# Altium PCB PCB_Mach_giao_tiep.PcbDoc (part 2 of 2)
Units mm, origin at the board's own origin, x right, y up, seen from the top; angles counter-clockwise.
Board outline 102.41 x 90.02 mm, 2 copper layers (Top Layer, Bottom Layer); 27 components, 181 nets, 442 pads, 75 vias.
Unrouted connection lines stored in the file: 4.
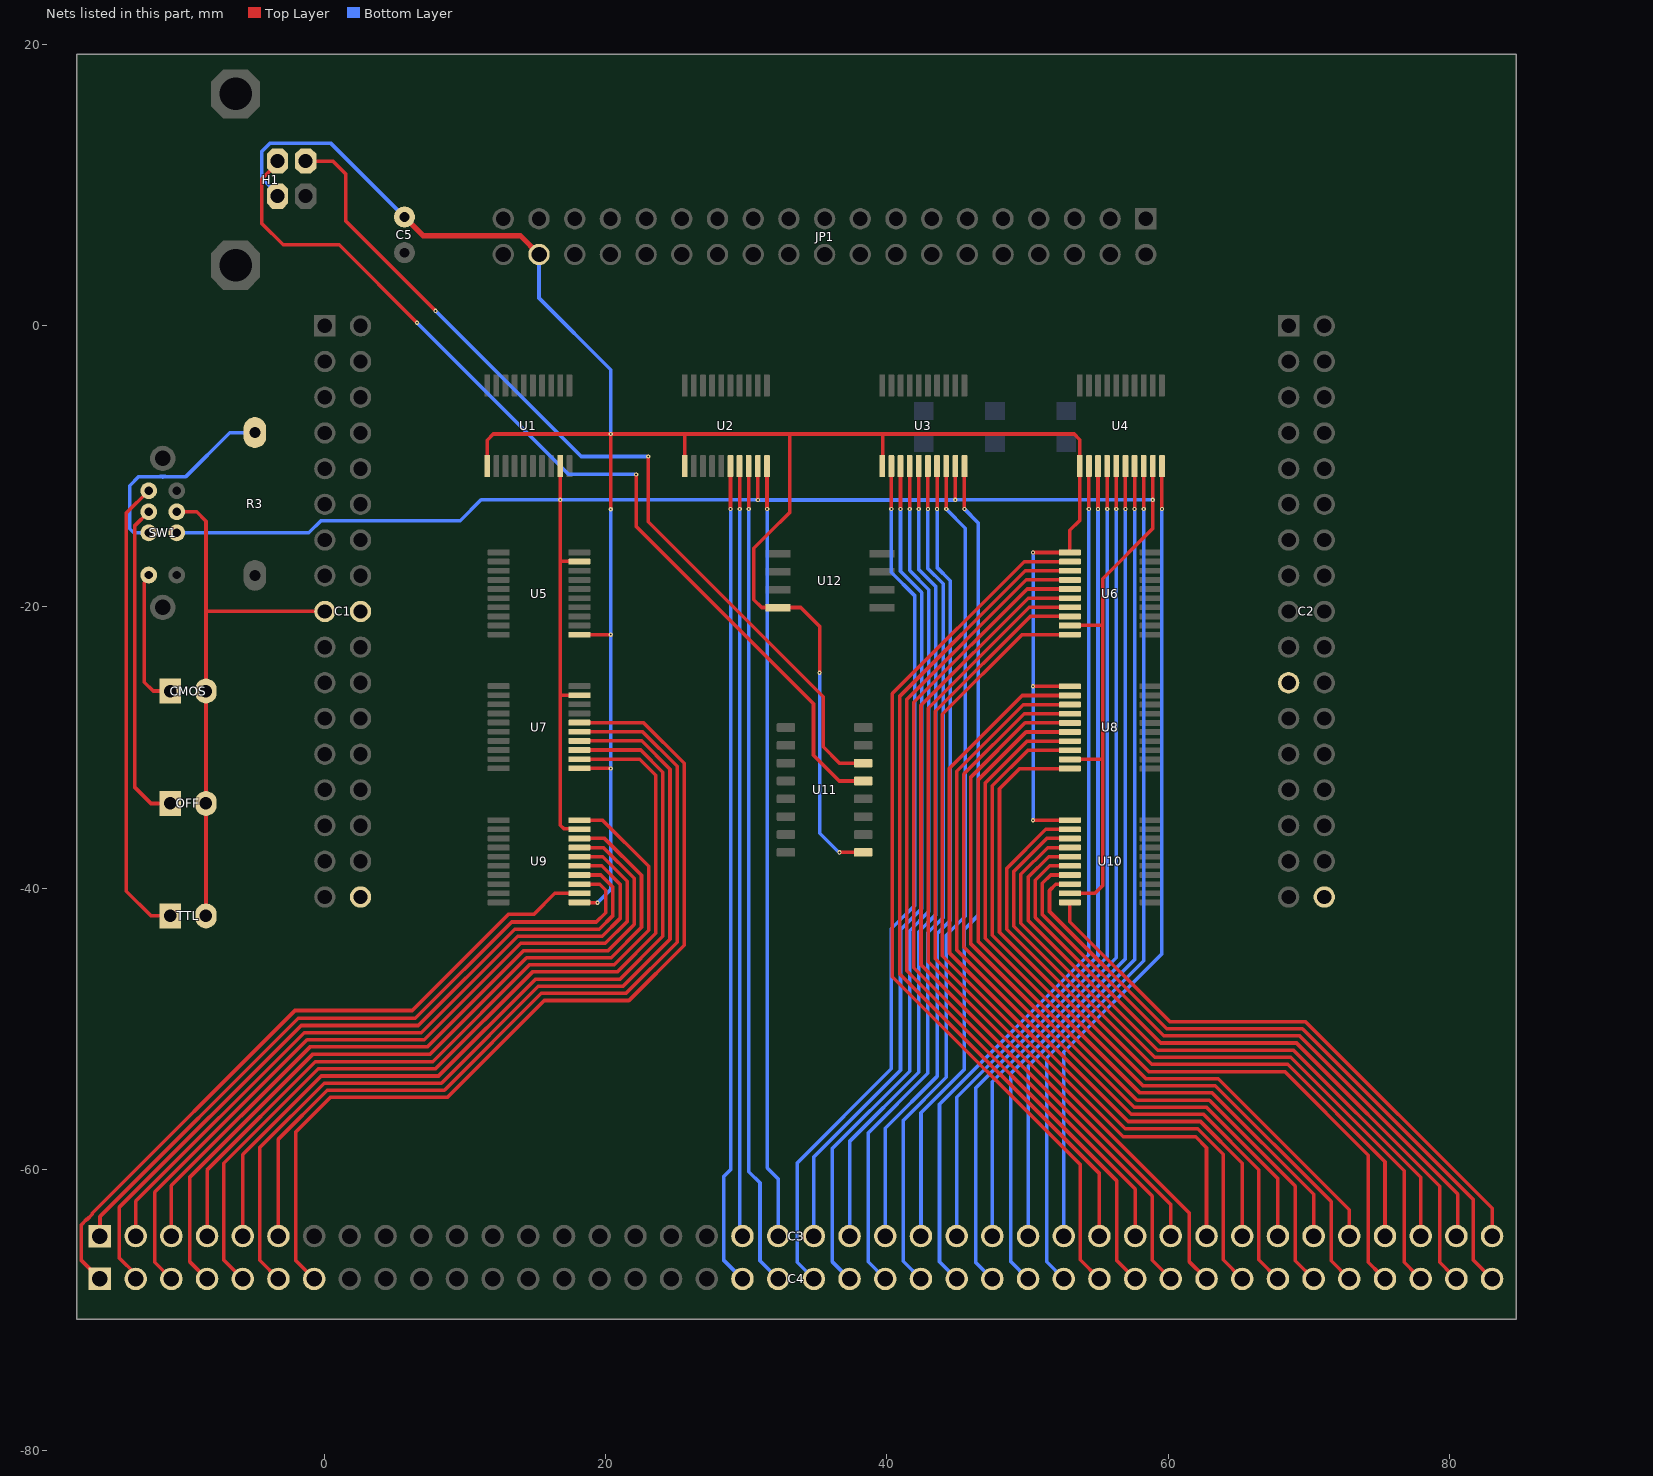
[diagram p2: the nets of this part, all layers, seen from the top]

## Via types
v1: diameter 0.305, hole 0.127, Top Layer to Bottom Layer, tented both sides, 75 vias

## Nets (pads, with @x,y where several pads share a name; then routed paths per layer and width w, separated by ;. In a path a pad name is that pad's centre, name@x,y a point inside that pad or via, vN(x,y) a via of type N, cw(c..) or ccw(c..) an arc to the next point about the centre after c; other vN are vias at no path point) (continued)
B33: C4.7 U7.16 | length 65.8
  Top Layer w0.254: C4.7@-0.762,-67.818 -2.057,-66.523 -2.057,-57.338 0.379,-54.902 8.718,-54.902 15.614,-48.006 21.638,-48.006 25.578,-44.066 25.578,-31.133 22.676,-28.232 U7.16@18.11,-28.232
B34: C3.6 U7.15 | length 61.6
  Top Layer w0.254: C3.6@-3.302,-64.77 -3.302,-57.864 0.168,-54.394 8.508,-54.394 15.404,-47.498 21.427,-47.498 25.07,-43.855 25.07,-31.344 22.608,-28.882 U7.15@18.11,-28.882
B35: C4.6 U7.14 | length 64.6
  Top Layer w0.254: C4.6@-3.302,-67.818 -4.623,-66.497 -4.623,-58.467 -0.042,-53.886 8.298,-53.886 15.193,-46.99 21.217,-46.99 24.562,-43.645 24.562,-31.554 22.539,-29.532 U7.14@18.11,-29.532
B40: C3.5 U7.13 | length 60.4
  Top Layer w0.254: C3.5@-5.842,-64.77 -5.842,-58.968 -0.252,-53.378 8.087,-53.378 14.983,-46.482 21.006,-46.482 24.054,-43.435 24.054,-31.765 22.471,-30.182 U7.13@18.11,-30.182
B41: C4.5 U7.12 | length 63.5
  Top Layer w0.254: C4.5@-5.842,-67.818 -7.188,-66.472 -7.188,-59.595 -0.463,-52.87 7.877,-52.87 14.773,-45.974 20.796,-45.974 23.546,-43.224 23.546,-31.975 22.403,-30.832 U7.12@18.11,-30.832
B43: C3.4 U9.20 | length 54
  Top Layer w0.254: C3.4@-8.382,-64.77 -8.382,-60.071 -0.673,-52.362 7.666,-52.362 14.562,-45.466 20.586,-45.466 23.038,-43.014 23.038,-38.452 19.761,-35.175 U9.20@18.11,-35.175
B44: C4.4 U9.18 | length 56.5
  Top Layer w0.254: C4.4@-8.382,-67.818 -9.627,-66.573 -9.627,-60.597 -0.846,-51.816 7.494,-51.816 14.352,-44.958 20.375,-44.958 22.53,-42.803 22.53,-39.104 19.901,-36.475 U9.18@18.11,-36.475
B45: C3.3 U9.17 | length 52.3
  Top Layer w0.254: C3.3@-10.922,-64.77 -10.922,-61.174 -1.056,-51.308 7.283,-51.308 14.141,-44.45 20.165,-44.45 22.022,-42.593 22.022,-39.315 19.832,-37.125 U9.17@18.11,-37.125
B46: C4.3 U9.16 | length 55.2
  Top Layer w0.254: C4.3@-10.922,-67.818 -12.103,-66.637 -12.103,-61.636 -1.267,-50.8 7.073,-50.8 13.931,-43.942 19.954,-43.942 21.514,-42.382 21.514,-39.525 19.764,-37.775 U9.16@18.11,-37.775
B47: C3.2 U9.15 | length 51.2
  Top Layer w0.254: C3.2@-13.462,-64.77 -13.462,-62.277 -1.477,-50.292 6.863,-50.292 13.721,-43.434 19.744,-43.434 21.006,-42.172 21.006,-39.735 19.695,-38.425 U9.15@18.11,-38.425
B48: C4.2 U9.14 | length 54.1
  Top Layer w0.254: C4.2@-13.462,-67.818 -13.462,-67.488 -14.643,-66.307 -14.643,-62.74 -1.687,-49.784 6.652,-49.784 13.51,-42.926 19.533,-42.926 20.498,-41.962 20.498,-39.946 19.627,-39.075 U9.14@18.11,-39.075
B50: C3.1 U9.13 | length 50
  Top Layer w0.254: C3.1@-16.002,-64.77 -16.002,-63.38 -1.898,-49.276 6.442,-49.276 13.3,-42.418 19.323,-42.418 19.99,-41.751 19.99,-40.156 19.559,-39.725 U9.13@18.11,-39.725
B51: C4.1 U9.12 | length 49.7
  Top Layer w0.254: C4.1@-16.002,-67.818 -17.348,-66.472 -17.348,-64.008 -17.183,-63.843 -17.183,-63.812 -16.96,-63.589 -16.929,-63.589 -16.561,-63.221 -16.561,-63.149 -2.129,-48.717 6.21,-48.717 13.068,-41.859 14.884,-41.859 16.369,-40.375 U9.12@18.11,-40.375
B56: C3.40 U10.20 | length 41.9
  Top Layer w0.254: U10.20@53.01,-41.025 53.01,-42.405 60.11,-49.505 69.774,-49.505 83.058,-62.789 C3.40@83.058,-64.77
B57: C4.40 U10.18 | length 48
  Top Layer w0.254: U10.18@53.01,-39.725 52.02,-39.725 51.562,-40.183 51.562,-41.675 59.9,-50.013 69.563,-50.013 81.712,-62.161 81.712,-66.472 C4.40@83.058,-67.818
B58: C3.39 U10.17 | length 45.2
  Top Layer w0.254: U10.17@53.01,-39.075 51.642,-39.075 51.054,-39.663 51.054,-41.885 59.689,-50.521 69.353,-50.521 80.612,-61.78 80.612,-64.676 C3.39@80.518,-64.77
B59: C4.39 U10.16 | length 49.5
  Top Layer w0.254: U10.16@53.01,-38.425 51.574,-38.425 50.546,-39.453 50.546,-42.096 59.479,-51.029 69.143,-51.029 79.337,-61.223 79.337,-66.637 80.162,-67.462 80.518,-67.462 C4.39@80.518,-67.818
B61: C3.38 U10.15 | length 46.3
  Top Layer w0.254: U10.15@53.01,-37.775 51.506,-37.775 50.038,-39.243 50.038,-42.306 59.268,-51.537 68.932,-51.537 77.978,-60.582 C3.38@77.978,-64.77
B62: C4.38 U10.14 | length 50.7
  Top Layer w0.254: U10.14@53.01,-37.125 51.437,-37.125 49.53,-39.032 49.53,-42.517 59.058,-52.045 68.722,-52.045 76.797,-60.12 76.797,-66.637 77.648,-67.488 77.978,-67.488 C4.38@77.978,-67.818
B66: C3.37 U10.13 | length 47.5
  Top Layer w0.254: U10.13@53.01,-36.475 51.369,-36.475 49.022,-38.822 49.022,-42.727 58.848,-52.553 68.511,-52.553 75.438,-59.479 C3.37@75.438,-64.77
B67: C4.37 U10.12 | length 51.9
  Top Layer w0.254: U10.12@53.01,-35.825 51.3,-35.825 48.514,-38.611 48.514,-42.938 58.637,-53.061 68.301,-53.061 74.257,-59.017 74.257,-66.637 75.082,-67.462 75.438,-67.462 C4.37@75.438,-67.818
B74: C3.36 U8.20 | length 50.8
  Top Layer w0.254: U8.20@53.01,-31.5 49.45,-31.5 48.006,-32.944 48.006,-43.148 58.427,-53.569 63.576,-53.569 72.898,-62.89 C3.36@72.898,-64.77
B78: C4.36 U8.18 | length 55.2
  Top Layer w0.254: U8.18@53.01,-30.2 50.031,-30.2 47.498,-32.733 47.498,-43.358 58.216,-54.077 63.366,-54.077 71.603,-62.313 71.603,-66.523 C4.36@72.898,-67.818
B79: C3.35 U8.17 | length 52.2
  Top Layer w0.254: U8.17@53.01,-29.55 49.963,-29.55 46.99,-32.523 46.99,-43.569 58.006,-54.585 63.155,-54.585 70.358,-61.787 C3.35@70.358,-64.77
B80: C4.35 U8.16 | length 56.4
  Top Layer w0.254: U8.16@53.01,-28.9 49.895,-28.9 46.482,-32.313 46.482,-43.779 57.795,-55.093 62.945,-55.093 69.063,-61.21 69.063,-66.523 C4.35@70.358,-67.818
B81: C3.34 U8.15 | length 53.4
  Top Layer w0.254: U8.15@53.01,-28.25 49.826,-28.25 45.974,-32.102 45.974,-43.99 57.585,-55.601 62.735,-55.601 67.818,-60.684 C3.34@67.818,-64.77
B82: C4.34 U8.14 | length 57.5
  Top Layer w0.254: U8.14@53.01,-27.6 49.758,-27.6 45.466,-31.892 45.466,-44.2 57.375,-56.109 62.524,-56.109 66.459,-60.043 66.459,-65.357 66.446,-65.37 66.446,-66.446 C4.34@67.818,-67.818
B83: C3.33 U8.13 | length 54.5
  Top Layer w0.254: U8.13@53.01,-26.95 49.689,-26.95 44.958,-31.681 44.958,-44.41 57.164,-56.617 62.314,-56.617 65.278,-59.581 C3.33@65.278,-64.77
B84: C4.33 U8.12 | length 58.7
  Top Layer w0.254: U8.12@53.01,-26.3 49.621,-26.3 44.45,-31.471 44.45,-44.621 56.954,-57.125 62.103,-57.125 63.919,-58.94 63.919,-66.459 C4.33@65.278,-67.818
B85: C3.32 U6.20 | length 59.3
  Top Layer w0.254: U6.20@53.01,-21.975 49.602,-21.975 43.942,-27.635 43.942,-44.831 56.82,-57.709 61.969,-57.709 62.738,-58.478 C3.32@62.738,-64.77
B87: C4.32 U6.18 | length 60.8
  Top Layer w0.254: U6.18@53.01,-20.675 50.184,-20.675 43.434,-27.425 43.434,-45.042 61.493,-63.101 61.493,-66.573 62.636,-67.716 62.738,-67.716 C4.32@62.738,-67.818
B88: C3.31 U6.17 | length 57.8
  Top Layer w0.254: U6.17@53.01,-20.025 50.115,-20.025 42.926,-27.214 42.926,-45.252 60.195,-62.521 60.195,-64.767 C3.31@60.198,-64.77
B92: C4.31 U6.16 | length 62
  Top Layer w0.254: U6.16@53.01,-19.375 50.047,-19.375 42.418,-27.004 42.418,-45.463 58.877,-61.922 58.877,-66.497 60.122,-67.742 60.198,-67.742 C4.31@60.198,-67.818
B93: C3.30 U6.15 | length 58.9
  Top Layer w0.254: U6.15@53.01,-18.725 49.979,-18.725 41.91,-26.794 41.91,-45.673 57.658,-61.421 C3.30@57.658,-64.77
B94: C4.30 U6.14 | length 63.1
  Top Layer w0.254: U6.14@53.01,-18.075 49.91,-18.075 41.402,-26.583 41.402,-45.883 56.337,-60.819 56.337,-66.497 C4.30@57.658,-67.818
B95: C3.29 U6.13 | length 60.1
  Top Layer w0.254: U6.13@53.01,-17.425 49.842,-17.425 40.894,-26.373 40.894,-46.094 55.118,-60.318 C3.29@55.118,-64.77
B97: C4.29 U6.12 | length 64.3
  Top Layer w0.254: U6.12@53.01,-16.775 49.773,-16.775 40.386,-26.162 40.386,-46.304 53.759,-59.677 53.759,-66.459 C4.29@55.118,-67.818
B98: C3.28 U4.20 | length 57.7
  Top Layer w0.254: v1(59.567,-13.035) U4.20@59.567,-9.982
  Bottom Layer w0.254: C3.28@52.578,-64.77 52.578,-51.664 59.567,-44.675 v1(59.567,-13.035)
B99: C4.28 U4.18 | length 61.2
  Top Layer w0.254: v1(58.267,-13.035) U4.18@58.267,-9.982
  Bottom Layer w0.254: C4.28@52.578,-67.818 51.359,-66.599 51.359,-52.077 58.267,-45.169 v1(58.267,-13.035)
B105: C3.27 U4.17 | length 57.9
  Top Layer w0.254: v1(57.617,-13.035) U4.17@57.617,-9.982
  Bottom Layer w0.254: C3.27@50.038,-64.77 50.038,-52.679 57.617,-45.1 v1(57.617,-13.035)
B111: C4.27 U4.16 | length 61.7
  Top Layer w0.254: v1(56.967,-13.035) U4.16@56.967,-9.982
  Bottom Layer w0.254: C4.27@50.038,-67.818 48.819,-66.599 48.819,-53.18 56.967,-45.032 v1(56.967,-13.035)
B112: C3.26 U4.15 | length 58.4
  Top Layer w0.254: v1(56.317,-13.035) U4.15@56.317,-9.982
  Bottom Layer w0.254: C3.26@47.498,-64.77 47.498,-53.782 56.317,-44.963 v1(56.317,-13.035)
B114: C4.26 U4.14 | length 62.4
  Top Layer w0.254: v1(55.667,-13.035) U4.14@55.667,-9.982
  Bottom Layer w0.254: C4.26@47.498,-67.818 47.498,-67.513 47.193,-67.513 46.304,-66.624 46.304,-54.258 55.667,-44.895 v1(55.667,-13.035)
B115: C3.25 U4.13 | length 59
  Top Layer w0.254: v1(55.017,-13.035) U4.13@55.017,-9.982
  Bottom Layer w0.254: C3.25@44.958,-64.77 44.958,-54.886 55.017,-44.827 v1(55.017,-13.035)
B116: C4.25 U4.12 | length 62.7
  Top Layer w0.254: v1(54.367,-13.035) U4.12@54.367,-9.982
  Bottom Layer w0.254: C4.25@44.958,-67.818 43.739,-66.599 43.739,-55.386 54.367,-44.758 v1(54.367,-13.035)
B117: C3.24 U3.20 | length 56.9
  Top Layer w0.254: v1(45.512,-13.035) U3.20@45.512,-9.982
  Bottom Layer w0.254: C3.24@42.418,-64.77 42.418,-55.989 45.512,-52.894 45.512,-42.93 46.482,-41.96 46.482,-14.004 v1(45.512,-13.035)
B118: C4.24 U3.18 | length 60.8
  Top Layer w0.254: v1(44.212,-13.035) U3.18@44.212,-9.982
  Bottom Layer w0.254: C4.24@42.418,-67.818 41.148,-66.548 41.148,-56.54 44.212,-53.476 44.212,-43.366 45.568,-42.01 45.568,-14.39 v1(44.212,-13.035)
B119: C3.23 U3.17 | length 57.1
  Top Layer w0.254: v1(43.562,-13.035) U3.17@43.562,-9.982
  Bottom Layer w0.254: C3.23@39.878,-64.77 39.878,-57.092 43.562,-53.408 43.562,-43.246 44.501,-42.307 44.501,-18.136 43.562,-17.197 v1(43.562,-13.035)
B120: C4.23 U3.16 | length 61
  Top Layer w0.254: v1(42.912,-13.035) U3.16@42.912,-9.982
  Bottom Layer w0.254: C4.23@39.878,-67.818 38.659,-66.599 38.659,-57.433 42.912,-53.179 42.912,-43.177 43.993,-42.097 43.993,-18.346 42.912,-17.266 v1(42.912,-13.035)
B121: C3.22 U3.15 | length 57.8
  Top Layer w0.254: v1(42.262,-13.035) U3.15@42.262,-9.982
  Bottom Layer w0.254: C3.22@37.338,-64.77 37.338,-58.035 42.262,-53.111 42.262,-43.109 43.485,-41.886 43.485,-18.556 42.262,-17.334 v1(42.262,-13.035)
B124: C4.22 U3.14 | length 61.8
  Top Layer w0.254: v1(41.612,-13.035) U3.14@41.612,-9.982
  Bottom Layer w0.254: C4.22@37.338,-67.818 36.093,-66.573 36.093,-58.561 41.612,-53.043 41.612,-43.041 42.977,-41.676 42.977,-18.767 41.612,-17.402 v1(41.612,-13.035)
B126: C3.21 U3.13 | length 58.6
  Top Layer w0.254: v1(40.962,-13.035) U3.13@40.962,-9.982
  Bottom Layer w0.254: C3.21@34.798,-64.77 34.798,-59.138 40.962,-52.974 40.962,-42.968 42.469,-41.462 42.469,-18.977 40.962,-17.471 v1(40.962,-13.035)
B127: C4.21 U3.12 | length 62.4
  Top Layer w0.254: v1@40.312,-13.007 U3.12@40.312,-9.982
  Bottom Layer w0.254: C4.21@34.798,-67.818 33.604,-66.624 33.604,-59.563 40.312,-52.855 40.312,-42.9 41.961,-41.251 41.961,-19.188 40.312,-17.539 v1(40.312,-13.035)
B140: C3.20 U2.20 | length 55.1
  Top Layer w0.254: U2.20@31.458,-9.982 31.464,-9.988 31.464,-13.028 v1(31.471,-13.035) ; v1@31.464,-13.054 v1@31.471,-13.06
  Bottom Layer w0.254: v1(31.471,-13.035) 31.471,-59.919 32.258,-60.706 C3.20@32.258,-64.77
B141: C4.20 U2.18 | length 58.9
  Top Layer w0.254: U2.18@30.158,-9.982 30.164,-9.988 30.164,-13.028 v1(30.171,-13.035) ; v1@30.164,-13.054 v1@30.171,-13.06
  Bottom Layer w0.254: v1(30.171,-13.035) 30.171,-60.193 30.963,-60.985 30.963,-66.523 31.902,-67.462 32.258,-67.462 C4.20@32.258,-67.818
B142: C3.19 U2.17 | length 54.9
  Top Layer w0.254: U2.17@29.508,-9.982 29.514,-9.988 29.514,-13.028 v1(29.521,-13.035) ; v1@29.514,-13.054 v1@29.521,-13.06
  Bottom Layer w0.254: v1(29.521,-13.035) 29.53,-13.044 29.53,-64.582 C3.19@29.718,-64.77
B143: C4.19 U2.16 | length 58.6
  Top Layer w0.254: U2.16@28.858,-9.982 28.864,-9.988 28.864,-13.028 v1(28.871,-13.035) ; v1@28.864,-13.054 v1@28.871,-13.06
  Bottom Layer w0.254: v1(28.871,-13.035) 28.871,-60.055 28.372,-60.554 28.372,-66.472 C4.19@29.718,-67.818
GND: C1.9 C1.18 C1.26 C2.11 C2.18 C5.2 CMOS.2 H1.4 JP1.21 OFF.2 SW1.7 TTL.2 U1.11 U2.11 U3.11 U4.11 U5.11 U6.11 U7.11 U8.11 U9.11 U10.11 U11.1 U12.4 | length 241.1
  Top Layer w0.254: SW1.7@-10.536,-13.229 -9.123,-13.229 -8.458,-13.894 -8.458,-20.32 ; TTL.2@-8.458,-41.986 OFF.2@-8.458,-33.985 CMOS.2@-8.458,-25.984 -8.458,-20.32 ; C1.9@0,-20.32 -8.458,-20.32 ; U1.11@11.553,-9.982 11.553,-8.132 11.989,-7.696 v1(20.345,-7.696) ; U9.11@18.11,-41.025 18.131,-41.046 v1(19.406,-41.046) ; U7.11@18.11,-31.482 20.331,-31.482 v1(20.345,-31.496) ; U5.11@18.11,-21.975 20.341,-21.975 v1(20.345,-21.971) ; v1(20.345,-13.056) v1(20.345,-7.696) ; U2.11@25.608,-9.982 25.603,-9.978 25.603,-7.696 ; v1(35.204,-24.689) 35.21,-24.683 35.21,-21.393 33.858,-20.041 U12.4@32.233,-20.041 31.09,-20.041 30.531,-19.482 30.531,-15.824 31.521,-14.834 33.096,-13.259 33.096,-7.696 ; v1(36.62,-37.465) U11.1@38.31,-37.465 ; U3.11@39.662,-9.982 39.7,-9.944 39.7,-7.696 ; v1(50.398,-35.175) U10.11@53.01,-35.175 ; v1(50.398,-25.65) U8.11@53.01,-25.65 ; v1(50.398,-16.125) U6.11@53.01,-16.125 53.01,-14.554 53.717,-13.847 U4.11@53.717,-9.982 53.717,-8.099 53.315,-7.696 39.7,-7.696 ; v1(20.345,-7.696) 25.603,-7.696 ; 25.603,-7.696 33.096,-7.696 ; 33.096,-7.696 39.7,-7.696
  Top Layer w0.381: C5.2@5.664,7.747 6.996,6.415 13.904,6.415 JP1.21@15.24,5.08
  Bottom Layer w0.254: H1.4@-3.362,9.227 -3.362,9.377 -4.493,10.508 -4.493,12.41 -3.894,13.008 0.403,13.008 C5.2@5.664,7.747 ; JP1.21@15.24,5.08 15.24,1.981 20.345,-3.124 v1(20.345,-7.696) ; v1@19.38,-41.021 v1(19.406,-41.046) 20.345,-40.107 v1(20.345,-31.496) v1(20.345,-13.056) ; v1(35.204,-24.689) 35.204,-36.093 v1@36.598,-37.487 ; v1(50.398,-35.175) v1(50.398,-25.65) v1(50.398,-16.125)
NetCMOS_1: CMOS.1 SW1.1 | length 9.9
  Top Layer w0.254: SW1.1@-12.536,-17.729 -12.536,-17.971 -12.842,-18.278 -12.842,-25.359 -12.217,-25.984 CMOS.1@-10.998,-25.984
NetH1_2: H1.2 U11.6 | length 64.2
  Top Layer w0.254: H1.2@-1.362,11.727 0.567,11.727 1.499,10.795 1.499,7.442 v1(7.874,1.067) ; v1(23.012,-9.296) 23.012,-13.945 35.458,-26.391 35.458,-29.953 36.62,-31.115 U11.6@38.31,-31.115
  Bottom Layer w0.254: v1(7.874,1.067) 18.237,-9.296 v1(23.012,-9.296)
NetH1_3: H1.3 U11.5 | length 68.5
  Top Layer w0.254: H1.3@-3.362,11.727 -3.362,11.577 -4.493,10.446 -4.493,7.287 -2.972,5.766 1.016,5.766 v1(6.553,0.229) ; v1(22.149,-10.571) 22.149,-14.275 34.773,-26.899 34.773,-30.563 36.595,-32.385 U11.5@38.31,-32.385
  Bottom Layer w0.254: v1(6.553,0.229) 17.353,-10.571 v1(22.149,-10.571)
NetOFF_1: OFF.1 SW1.3 | length 23
  Top Layer w0.254: SW1.3@-12.536,-13.229 -13.542,-14.236 -13.542,-32.813 -12.37,-33.985 OFF.1@-10.998,-33.985
NetR3_2: R3.2 SW1.2 | length 15
  Bottom Layer w0.254: SW1.2@-12.536,-14.729 -13.592,-14.729 -13.894,-14.427 -13.894,-11.379 -13.237,-10.723 -11.718,-10.723 ; -11.353,-10.723 -9.885,-10.723 -6.756,-7.595 R3.2@-4.978,-7.595
  Bottom Layer w0.305: -11.718,-10.723 ccw(c-11.536,-9.429) -11.353,-10.723
NetSW1_4: SW1.4 TTL.1 | length 33
  Top Layer w0.254: SW1.4@-12.536,-11.729 -14.122,-13.316 -14.122,-40.234 -12.37,-41.986 TTL.1@-10.998,-41.986
VCCB: SW1.6 U1.19 U2.19 U3.19 U4.19 U5.19 U6.19 U7.19 U8.19 U9.19 U10.19 | length 143.6
  Top Layer w0.254: U1.19@16.753,-9.982 v1(16.753,-12.381) 16.753,-16.731 ; U5.19@17.372,-16.736 16.753,-16.731 ; U5.19@17.376,-16.736 17.477,-16.736 U5.19@18.11,-16.775 U5.19@18.071,-16.736 ; U9.19@18.11,-35.825 18.071,-35.786 17.016,-35.786 16.753,-35.524 16.753,-26.282 ; U7.19@18.11,-26.282 16.753,-26.282 ; U2.19@30.808,-9.982 30.808,-12.385 v1(30.812,-12.389) ; v1(44.862,-12.381) U3.19@44.862,-9.982 ; U10.19@53.01,-40.375 54.799,-40.375 55.347,-39.827 55.347,-30.836 ; U8.19@53.01,-30.85 53.024,-30.836 55.347,-30.836 ; U6.19@53.01,-21.325 53.024,-21.311 55.347,-21.311 ; U4.19@58.917,-9.982 v1(58.917,-12.381) 58.917,-14.423 55.347,-17.994 55.347,-21.311 ; 16.753,-26.282 16.753,-16.731 ; 55.347,-30.836 55.347,-21.311
  Top Layer w0.305: U5.19@17.372,-16.736 ccw(c17.376,-16.279) U5.19@17.376,-16.736
  Bottom Layer w0.254: SW1.6@-10.536,-14.729 -1.139,-14.729 -0.276,-13.866 9.629,-13.866 11.114,-12.381 v1(16.753,-12.381) 30.803,-12.381 v1(30.812,-12.389) 44.854,-12.389 v1(44.862,-12.381) v1(58.917,-12.381)
pads on no net: H1.5 H1.6 SW1.9 SW1.10 U11.7 U11.8 U11.9 U11.10 U11.11 U11.12 U11.13 U11.14 U11.15 U12.3
copper on no net: | length 173.9
  Top Layer w0.254: -17.692,-77.583 -17.69,-77.075 ; -16.168,-77.841 -17.691,-77.329 ; -16.166,-76.825 -17.691,-77.329 ; 24.844,-77.445 -17.691,-77.329 ; 42.162,-77.492 84.697,-77.608 ; 83.171,-78.112 84.697,-77.608 ; 83.174,-77.096 84.697,-77.608 ; 84.696,-77.862 84.697,-77.354 ; 90.745,17.738 91.251,19.263 ; 90.843,-69.257 91.352,-70.78 ; 90.997,19.262 91.505,19.263 ; 91.098,-70.781 91.606,-70.78 ; 91.293,-17.735 91.251,19.263 ; 91.311,-33.783 91.352,-70.78 ; 91.761,17.739 91.251,19.263 ; 91.859,-69.256 91.352,-70.78

## Polygon pours and split planes (outlines as drawn)
GND on Bottom Layer "GND_L02_P000" (solid, remove dead copper, pour order 0): -17.501,19.253 -17.424,19.177 84.582,19.177 84.582,-70.434 84.633,-70.485 -17.551,-70.485
GND on Top Layer "GND_L01_P001" (hatched 45Degree grid 0.508 track 0.203, remove dead copper, pour order 1): -17.424,18.999 84.43,18.999 84.506,18.923 84.506,-70.612 -17.247,-70.612 -17.424,-70.434 -17.323,-70.333 -17.323,-70.358 -17.247,-70.434

## Other copper
Top Layer:
  text "NHÓM NGHIÊN CỨU FPGA" at 11.282,12.014 h4
  text "MẠCH GIAO TIẾP" at 76.198,0.468 h5 r270
  text "90.043 (mm)" at 90.379,-17.99 h1.52 r270.06
  text "102.388 (mm)" at 25.096,-78.359 h1.52 r359.84

## Silkscreen, mask and mechanical layers (free items; w line width, h text height)
Top Overlay:
  lines w0.254: -17.323,-59.538 84.43,-59.538 ; -14.681,-62.459 -14.681,-56.642 ; -12.142,-62.459 -12.142,-56.642 ; -9.603,-62.459 -9.603,-56.642 ; -7.063,-62.459 -7.063,-56.642 ; -4.524,-62.459 -4.524,-56.642 ; -1.985,-62.459 -1.985,-56.642 ; 0.555,-62.459 0.555,-56.642 ; 3.094,-62.459 3.094,-56.642 ; 5.633,-62.459 5.633,-56.642 ; 8.173,-62.459 8.173,-56.642 ; 10.712,-62.459 10.712,-56.642 ; 13.251,-62.459 13.251,-56.642 ; 15.791,-62.459 15.791,-56.642 ; 18.33,-62.459 18.33,-56.642 ; 20.869,-62.459 20.869,-56.642 ; 23.409,-62.459 23.409,-56.642 ; 25.948,-62.459 25.948,-56.642 ; 28.487,-62.459 28.487,-56.642 ; 31.027,-62.459 31.027,-56.642 ; 33.566,-62.459 33.566,-56.642 ; 36.105,-62.459 36.105,-56.642 ; 38.645,-62.459 38.645,-56.642 ; 41.184,-62.459 41.184,-56.642 ; 43.723,-62.459 43.723,-56.642 ; 46.263,-62.459 46.263,-56.642 ; 48.802,-62.459 48.802,-56.642 ; 51.341,-62.459 51.341,-56.642 ; 53.881,-62.459 53.881,-56.642 ; 56.42,-62.459 56.42,-56.642 ; 58.959,-62.459 58.959,-56.642 ; 61.499,-62.459 61.499,-56.642 ; 64.038,-62.459 64.038,-56.642 ; 66.577,-62.459 66.577,-56.642 ; 69.117,-62.459 69.117,-56.642 ; 71.656,-62.459 71.656,-56.642 ; 74.195,-62.459 74.195,-56.642 ; 76.735,-62.459 76.735,-56.642 ; 79.274,-62.459 79.274,-56.642 ; 81.813,-62.459 81.813,-56.642 ; -17.296,-62.457 84.453,-62.457 84.453,-56.618 -17.296,-56.618 -17.296,-62.457 ; 4.701,-42.213 9.447,-42.213 9.447,1.345 4.701,1.345 4.701,-42.213 ; 11.457,-1.776 11.457,2.919 60.042,2.919 60.042,-1.776 11.457,-1.776 ; 61.978,-42.315 66.699,-42.315 66.699,1.345 61.978,1.345 61.978,-42.315
  lines w0.305: 4.748,-39.754 9.371,-39.754 ; 4.774,-37.204 9.396,-37.204 ; 4.774,-34.653 9.396,-34.653 ; 4.774,-32.103 9.396,-32.103 ; 4.774,-29.552 9.396,-29.552 ; 4.774,-27.002 9.396,-27.002 ; 4.774,-24.451 9.396,-24.451 ; 4.774,-21.901 9.396,-21.901 ; 4.774,-19.351 9.396,-19.351 ; 4.774,-16.8 9.396,-16.8 ; 4.774,-14.25 9.396,-14.25 ; 4.774,-11.699 9.396,-11.699 ; 4.774,-9.149 9.396,-9.149 ; 4.774,-6.598 9.396,-6.598 ; 4.774,-4.048 9.396,-4.048 ; 4.774,-1.497 9.396,-1.497 ; 7.021,-42.24 7.021,1.372 ; 11.43,0.495 60.071,0.495 ; 14.122,-1.753 14.122,2.87 ; 16.571,-1.753 16.571,2.87 ; 19.122,-1.753 19.122,2.87 ; 21.672,-1.753 21.672,2.87 ; 24.223,-1.753 24.223,2.87 ; 26.773,-1.753 26.773,2.87 ; 29.324,-1.753 29.324,2.87 ; 31.874,-1.753 31.874,2.87 ; 34.424,-1.753 34.424,2.87 ; 36.975,-1.753 36.975,2.87 ; 39.525,-1.753 39.525,2.87 ; 42.076,-1.753 42.076,2.87 ; 44.626,-1.753 44.626,2.87 ; 47.177,-1.753 47.177,2.87 ; 49.727,-1.753 49.727,2.87 ; 52.278,-1.753 52.278,2.87 ; 54.828,-1.753 54.828,2.87 ; 57.607,-1.753 57.607,2.87 ; 62.001,-39.88 66.624,-39.88 ; 62.001,-37.101 66.624,-37.101 ; 62.001,-34.55 66.624,-34.55 ; 62.001,-32 66.624,-32 ; 62.001,-29.449 66.624,-29.449 ; 62.001,-26.899 66.624,-26.899 ; 62.001,-24.348 66.624,-24.348 ; 62.001,-21.798 66.624,-21.798 ; 62.001,-19.247 66.624,-19.247 ; 62.001,-16.697 66.624,-16.697 ; 62.001,-14.146 66.624,-14.146 ; 62.001,-11.596 66.624,-11.596 ; 62.001,-9.045 66.624,-9.045 ; 62.001,-6.495 66.624,-6.495 ; 62.001,-3.945 66.624,-3.945 ; 62.001,-1.394 66.624,-1.394 ; 64.249,-42.343 64.249,1.372
  text "5V" at 12.172,1.391 h1.2
  text "10" at 17.267,1.388 h1.2
  text "8" at 19.991,1.388 h1.2
  text "6" at 22.606,1.388 h1.2
  text "143" at 27.152,1.388 h1.2
  text "139" at 32.308,1.388 h1.2
  text "137" at 34.925,1.388 h1.2
  text "133" at 37.389,1.388 h1.2
  text "131" at 40.079,1.388 h1.2
  text "126" at 42.519,1.388 h1.2
  text "119" at 47.548,1.388 h1.2
  text "115" at 52.702,1.388 h1.2
  text "105" at 57.833,1.388 h1.2
  text "12" at 14.729,1.381 h1.2
  text "2" at 25.246,1.381 h1.2
  text "141" at 29.665,1.381 h1.2
  text "121" at 45.058,1.381 h1.2
  text "117" at 50.19,1.381 h1.2
  text "112" at 55.452,1.381 h1.2
  text "3.3V" at 64.974,1.077 h1.2 r270
  text "5V" at 62.857,0.655 h1.2 r270
  text "5V" at 6.205,-0.782 h1.2 r90
  text "GND" at 14.472,-0.879 h1
  text "142" at 29.722,-0.898 h1.2
  text "3.3V" at 11.762,-0.911 h1.1
  text "132" at 39.882,-0.924 h1.2
  text "11" at 17.467,-0.949 h1.2
  text "9" at 19.991,-0.943 h1.2
  text "7" at 22.606,-0.943 h1.2
  text "5" at 25.323,-0.936 h1.2
  text "1" at 28.078,-0.949 h1.2
  text "140" at 32.513,-0.943 h1.2
  text "138" at 35.077,-0.943 h1.2
  text "134" at 37.543,-0.943 h1.2
  text "127" at 42.57,-0.949 h1.2
  text "124" at 45.163,-0.949 h1.2
  text "120" at 47.88,-0.943 h1.2
  text "118" at 50.367,-0.943 h1.2
  text "116" at 52.781,-0.943 h1.2
  text "114" at 55.323,-0.949 h1.2
  text "111" at 58.037,-0.949 h1.2
  text "3.3V" at 8.457,-1.179 h1.2 r90
  text "102" at 62.856,-1.782 h1.2 r270
  text "101" at 64.974,-1.776 h1.2 r270
  text "14" at 8.464,-3.332 h1.2 r90
  text "5V IN" at 6.142,-3.857 h1 r90
  text "100" at 62.856,-4.37 h1.2 r270
  text "99" at 65.218,-4.605 h1.2 r270
  text "16" at 8.457,-5.874 h1.2 r90
  text "15" at 6.207,-5.927 h1.2 r90
  text "97" at 64.974,-7.323 h1.2 r270
  text "98" at 62.856,-7.348 h1.2 r270
  text "21" at 8.464,-8.409 h1.2 r90
  text "17" at 6.214,-8.439 h1.2 r90
  text "94" at 64.974,-9.687 h1.2 r270
  text "95" at 62.856,-9.708 h1.2 r270
  text "22" at 6.214,-11.019 h1.2 r90
  text "23" at 8.457,-11.049 h1.2 r90
  text "93" at 62.856,-12.302 h1.2 r270
  text "92" at 64.974,-12.331 h1.2 r270
  text "24" at 6.214,-13.612 h1.2 r90
  text "26" at 8.457,-13.665 h1.2 r90
  text "87" at 64.974,-14.867 h1.2 r270
  text "88" at 62.856,-14.917 h1.2 r270
  text "29" at 8.457,-16.002 h1.2 r90
  text "27" at 6.214,-16.027 h1.2 r90
  text "85" at 62.856,-17.379 h1.2 r270
  text "84" at 64.974,-17.383 h1.2 r270
  text "3.3V" at 6.207,-19.137 h1.2 r90
  text "3.3V" at 8.457,-19.137 h1.2 r90
  text "82" at 64.974,-19.976 h1.2 r270
  text "83" at 62.856,-20.048 h1.2 r270
  text "GND" at 8.398,-21.545 h1 r90
  text "GND" at 6.148,-21.596 h1 r90
  text "3.3V" at 64.974,-22.011 h1.2 r270
  text "81" at 62.856,-22.536 h1.2 r270
  text "30" at 6.207,-23.841 h1.2 r90
  text "32" at 8.457,-23.838 h1.2 r90
  text "GDN" at 62.915,-24.645 h1 r270
  text "80" at 64.974,-25.206 h1.2 r270
  text "33" at 6.207,-26.407 h1.2 r90
  text "34" at 8.457,-26.456 h1.2 r90
  text "79" at 62.856,-27.494 h1.2 r270
  text "78" at 64.974,-27.621 h1.2 r270
  text "35" at 6.207,-28.823 h1.2 r90
  text "40" at 8.457,-28.836 h1.2 r90
  text "74" at 62.851,-30.239 h1.2 r270
  text "67" at 64.974,-30.435 h1.2 r270
  text "41" at 6.214,-31.48 h1.2 r90
  text "43" at 8.457,-31.478 h1.2 r90
  text "66" at 62.856,-32.721 h1.2 r270
  text "62" at 64.974,-32.801 h1.2 r270
  text "44" at 6.212,-33.991 h1.2 r90
  text "45" at 8.455,-34.072 h1.2 r90
  text "59" at 64.974,-35.39 h1.2 r270
  text "61" at 62.856,-35.412 h1.2 r270
  text "47" at 8.462,-36.482 h1.2 r90
  text "46" at 6.207,-36.584 h1.2 r90
  text "58" at 62.856,-37.828 h1.2 r270
  text "57" at 64.981,-37.93 h1.2 r270
  text "50" at 8.457,-39.03 h1.2 r90
  text "48" at 6.207,-39.124 h1.2 r90
  text "GND" at 65.034,-40.151 h1 r270
  text "56" at 62.856,-40.445 h1.2 r270
  text "51" at 6.207,-41.573 h1.2 r90
  text "GND" at 8.398,-41.967 h1 r90
  text "7" at 21.813,-58.656 h1.5
  text "5" at 24.269,-58.656 h1.5
  text "50" at -16.739,-58.673 h1.5
  text "47" at -14.17,-58.668 h1.5
  text "45" at -11.811,-58.668 h1.5
  text "43" at -9.217,-58.673 h1.5
  text "40" at -6.472,-58.673 h1.5
  text "34" at -4.012,-58.673 h1.5
  text "32" at -1.444,-58.673 h1.5
  text "29" at 1.105,-58.673 h1.5
  text "26" at 3.722,-58.673 h1.5
  text "23" at 6.262,-58.673 h1.5
  text "21" at 8.844,-58.673 h1.5
  text "16" at 11.321,-58.673 h1.5
  text "14" at 13.863,-58.673 h1.5
  text "11" at 16.519,-58.673 h1.5
  text "9" at 19.293,-58.673 h1.5
  text "1" at 26.95,-58.673 h1.5
  text "142" at 28.732,-58.673 h1.5
  text "140" at 31.294,-58.673 h1.5
  text "126" at 33.858,-58.673 h1.5
  text "121" at 36.466,-58.673 h1.5
  text "119" at 38.912,-58.673 h1.5
  text "117" at 41.453,-58.673 h1.5
  text "115" at 43.913,-58.673 h1.5
  text "112" at 46.589,-58.673 h1.5
  text "105" at 49.12,-58.673 h1.5
  text "98" at 51.94,-58.673 h1.5
  text "95" at 54.477,-58.673 h1.5
  text "93" at 57.046,-58.673 h1.5
  text "88" at 59.56,-58.673 h1.5
  text "85" at 62.071,-58.673 h1.5
  text "83" at 64.716,-58.673 h1.5
  text "81" at 67.299,-58.673 h1.5
  text "79" at 69.775,-58.673 h1.5
  text "74" at 72.216,-58.668 h1.5
  text "66" at 74.773,-58.673 h1.5
  text "61" at 77.507,-58.673 h1.5
  text "58" at 79.88,-58.673 h1.5
  text "56" at 82.421,-58.673 h1.5

## Text inside footprints (layer, text, board x,y; h text height)
H1: Top Overlay "1:VCC" at -15.062,6.248 h1.52; Top Overlay "2:D+" at -14.935,8.661 h1.52; Top Overlay "3:D-" at -15.011,10.922 h1.52; Top Overlay "4:GND" at -14.986,13.132 h1.52; Top Overlay "1" at -1.168,6.807 h1; Top Overlay "3" at -3.556,13.462 h1; Top Overlay "2" at -1.397,13.335 h1; Top Overlay "4" at -3.734,6.985 h1
R3: Top Overlay "R" at -4.458,-14.008 h1 r90
U12: Top Overlay "*" at 31.662,-15.825 h1.27; Mechanical 13 "*" at 33.312,-16.789 h1.27